# Altium PCB 8500_anger.PcbDoc
Units mil, origin at the board's own origin, x right, y up, seen from the top; angles counter-clockwise.
Board outline 2040 x 2040 mil, 4 copper layers (Top Layer, Conexiones, Tierra, Bottom Layer); 147 components, 91 nets, 428 pads, 93 vias.
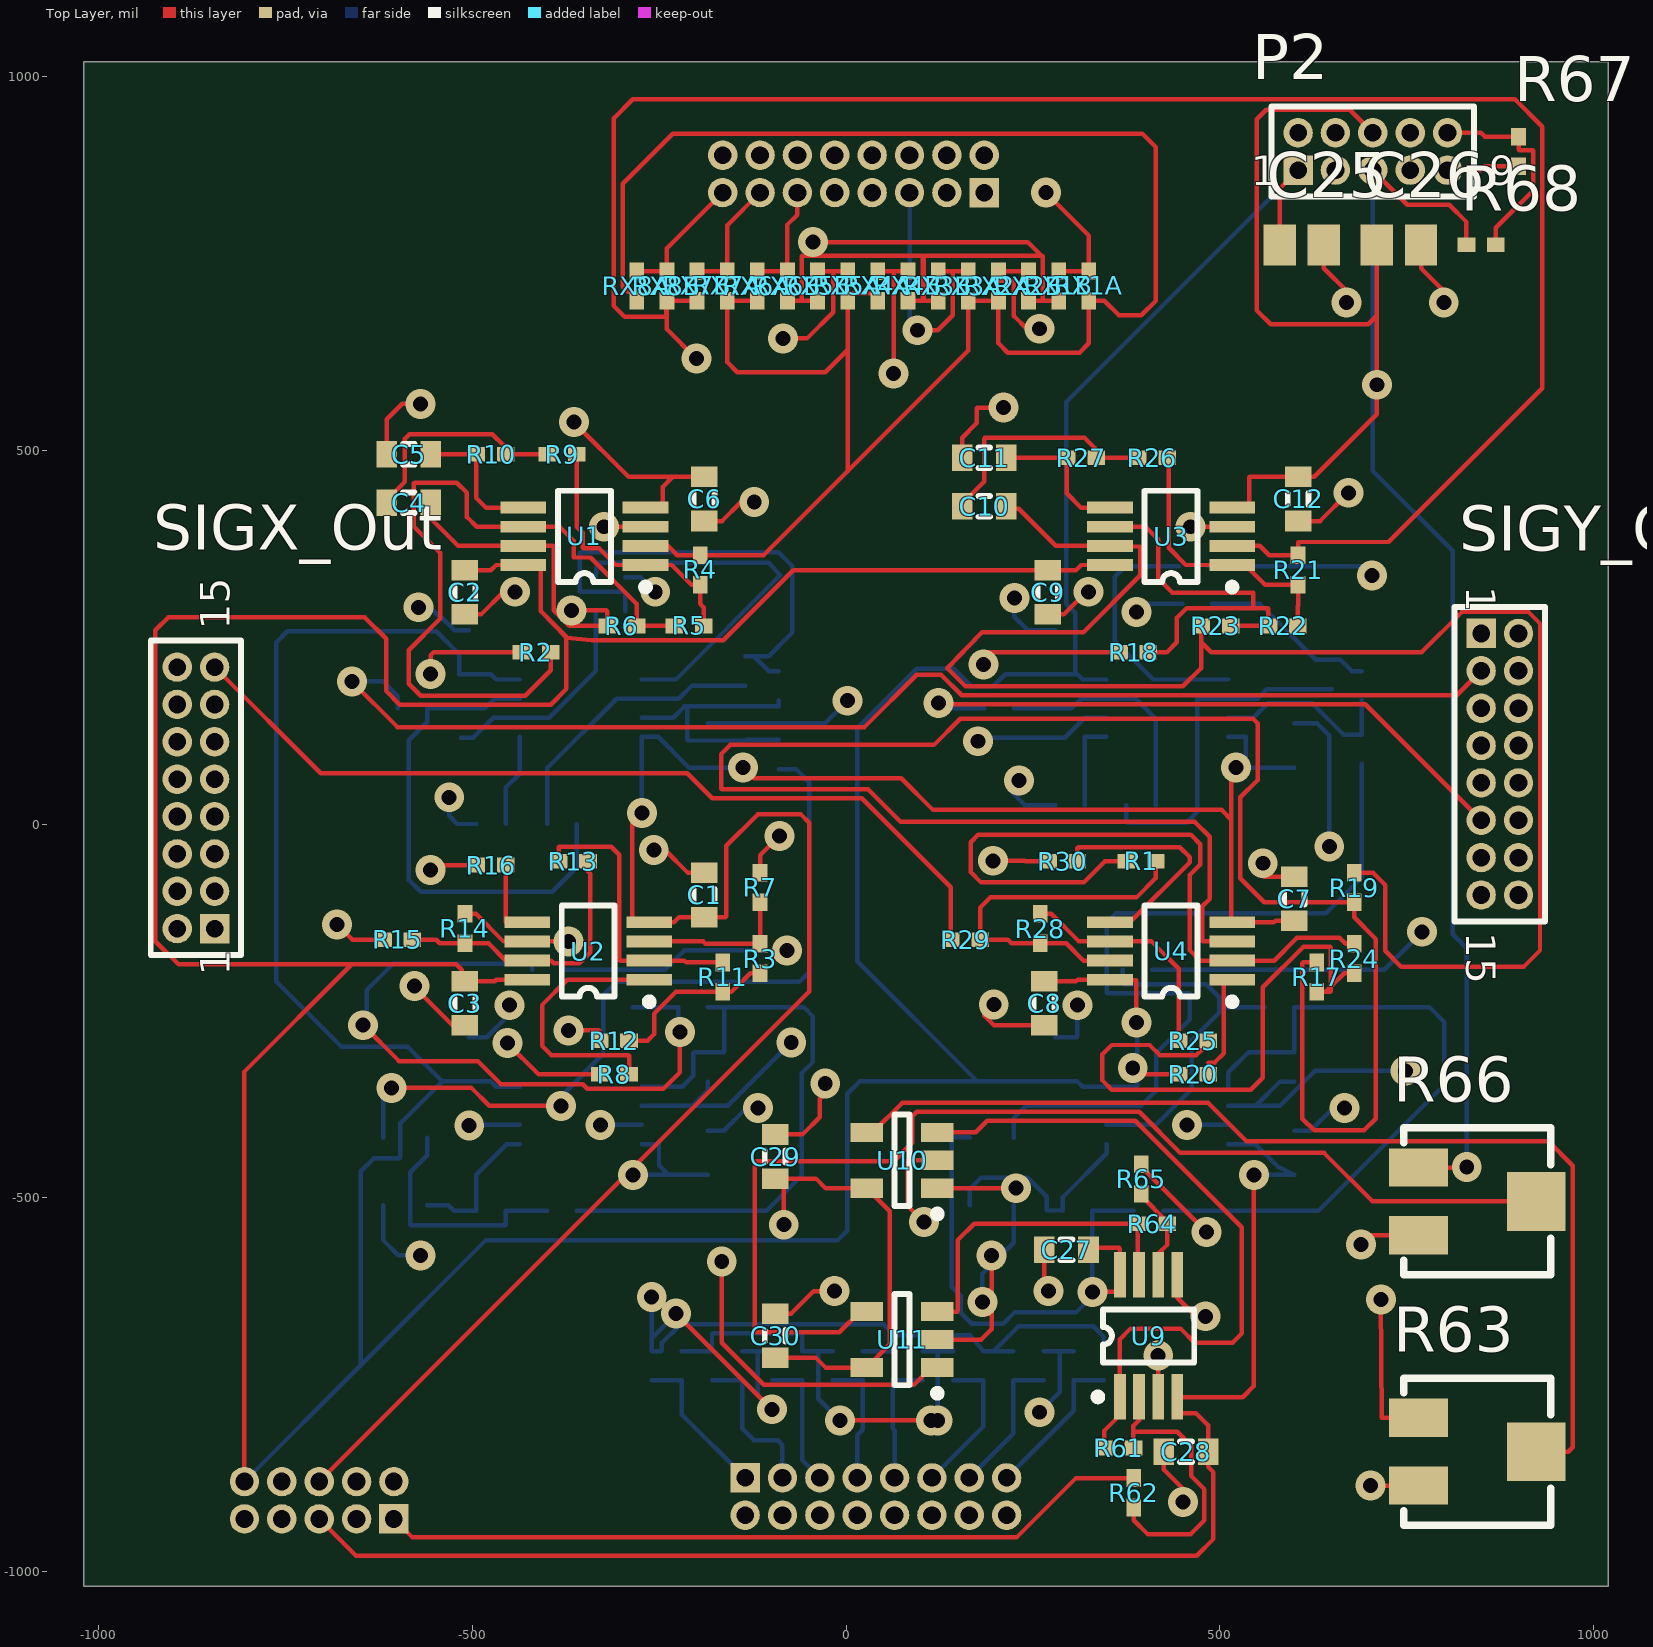
[diagram p0: Top Layer view]
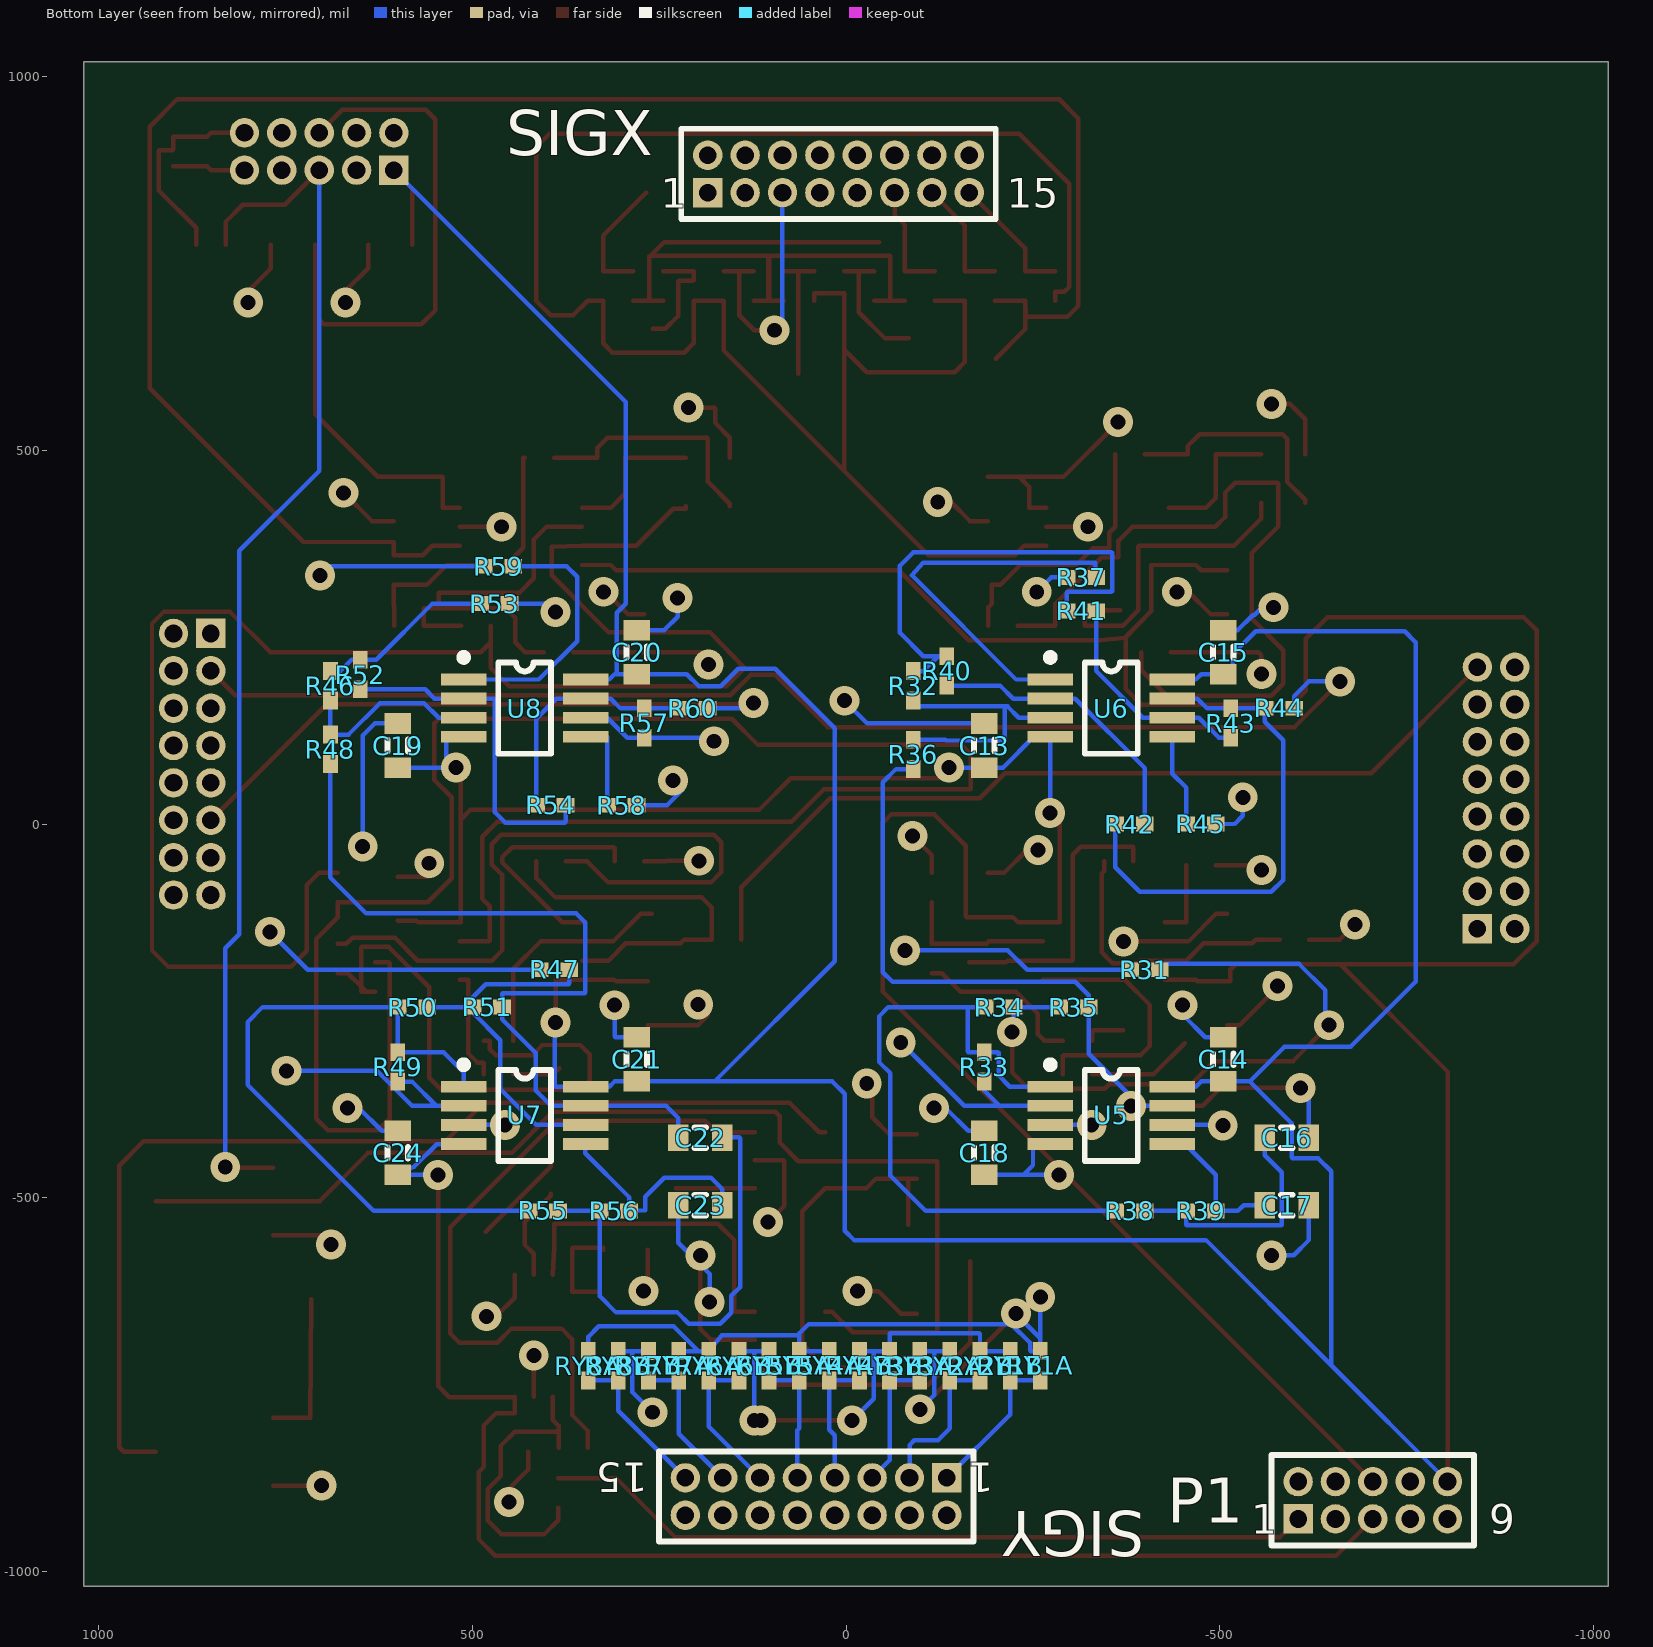
[diagram p1: Bottom Layer view, seen from below]
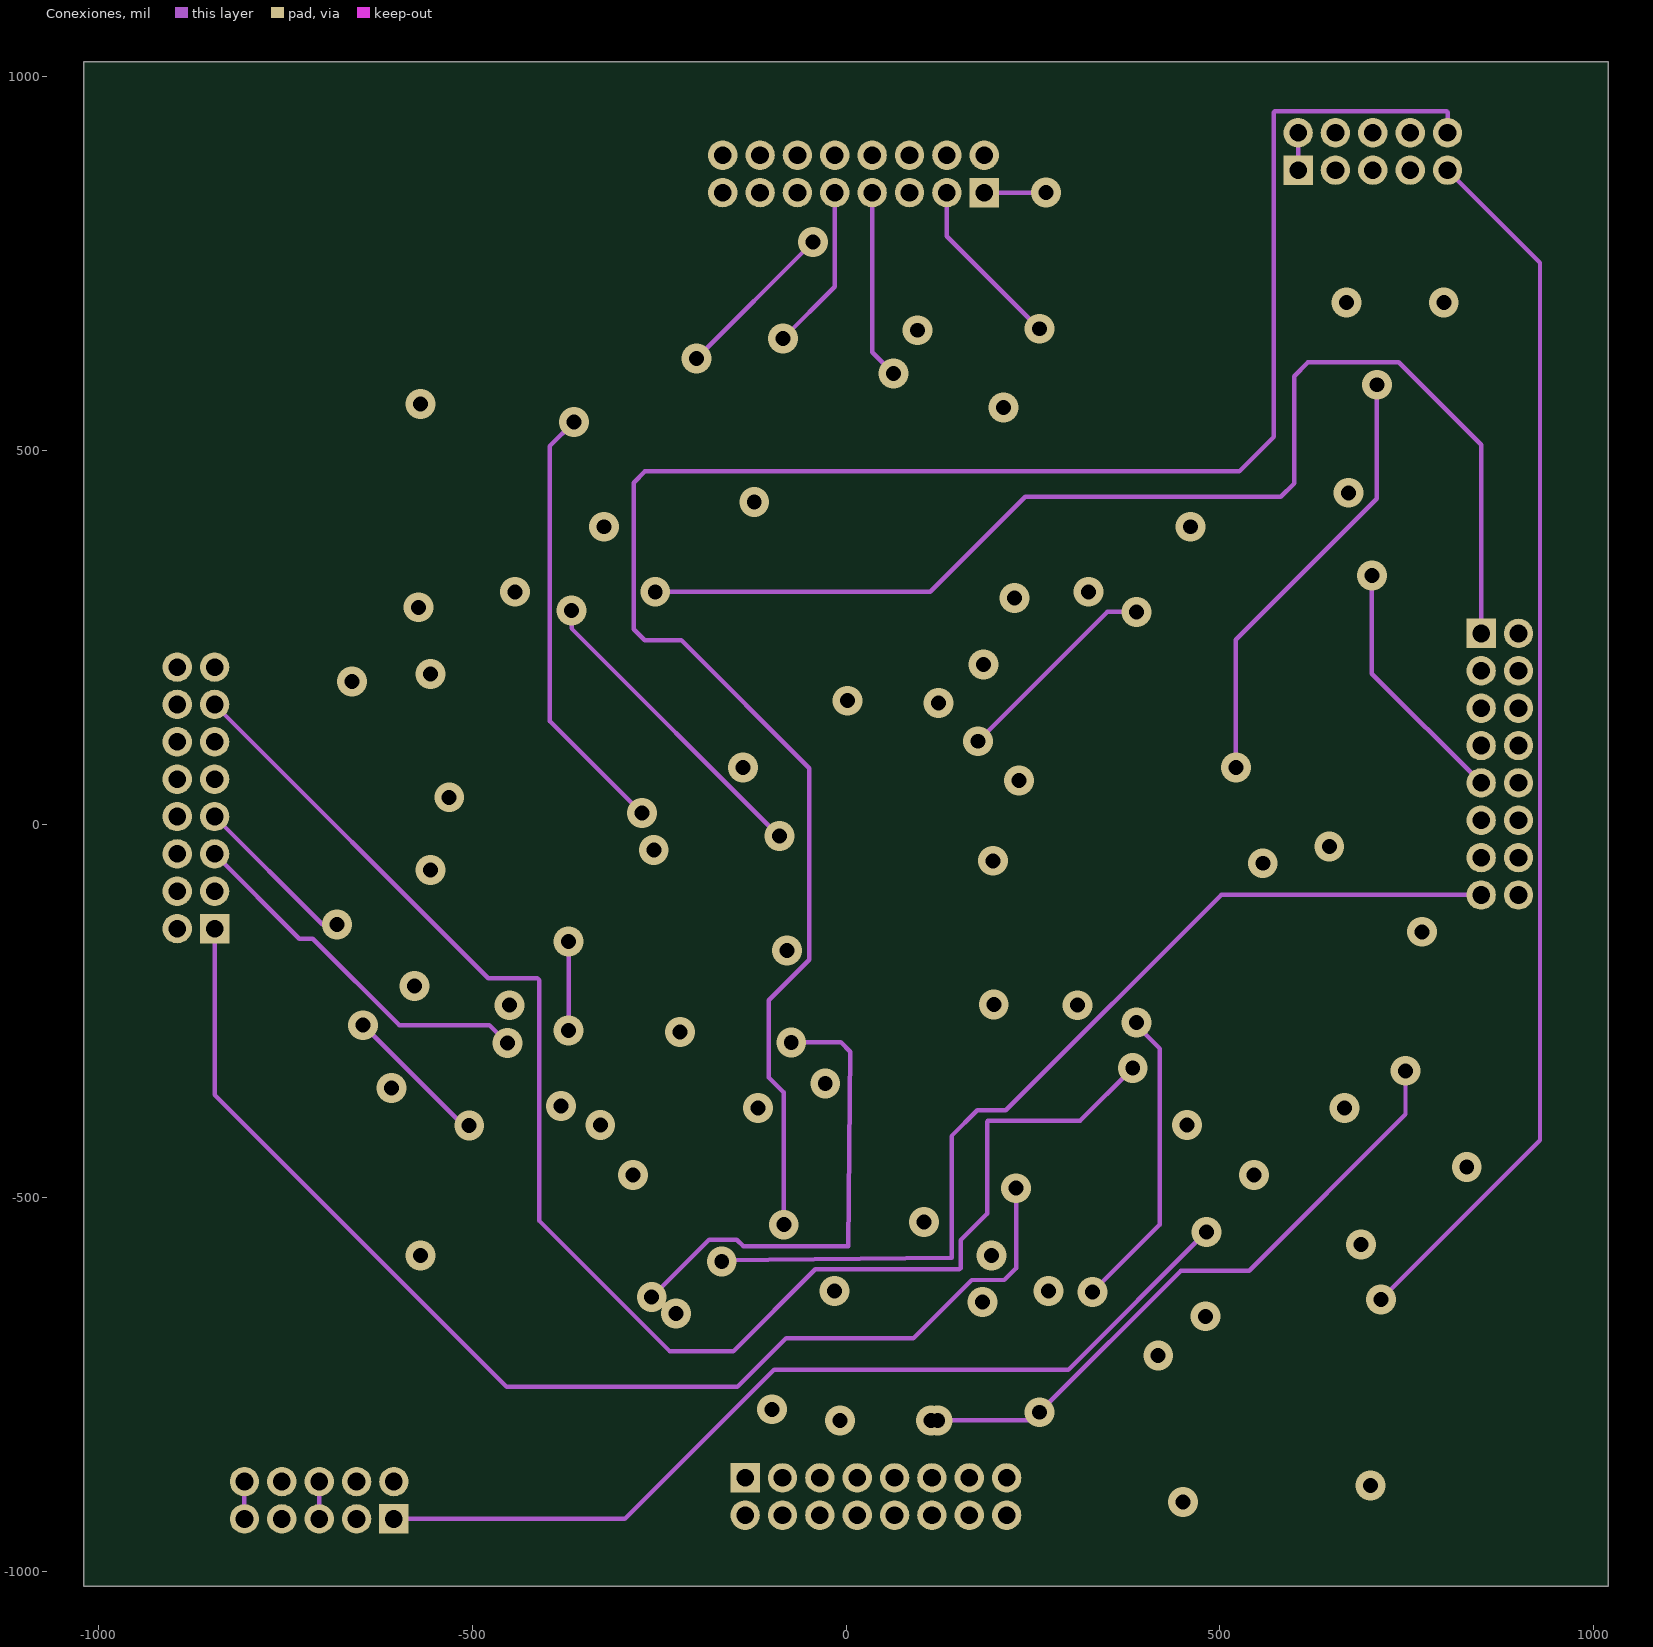
[diagram p2: Conexiones]
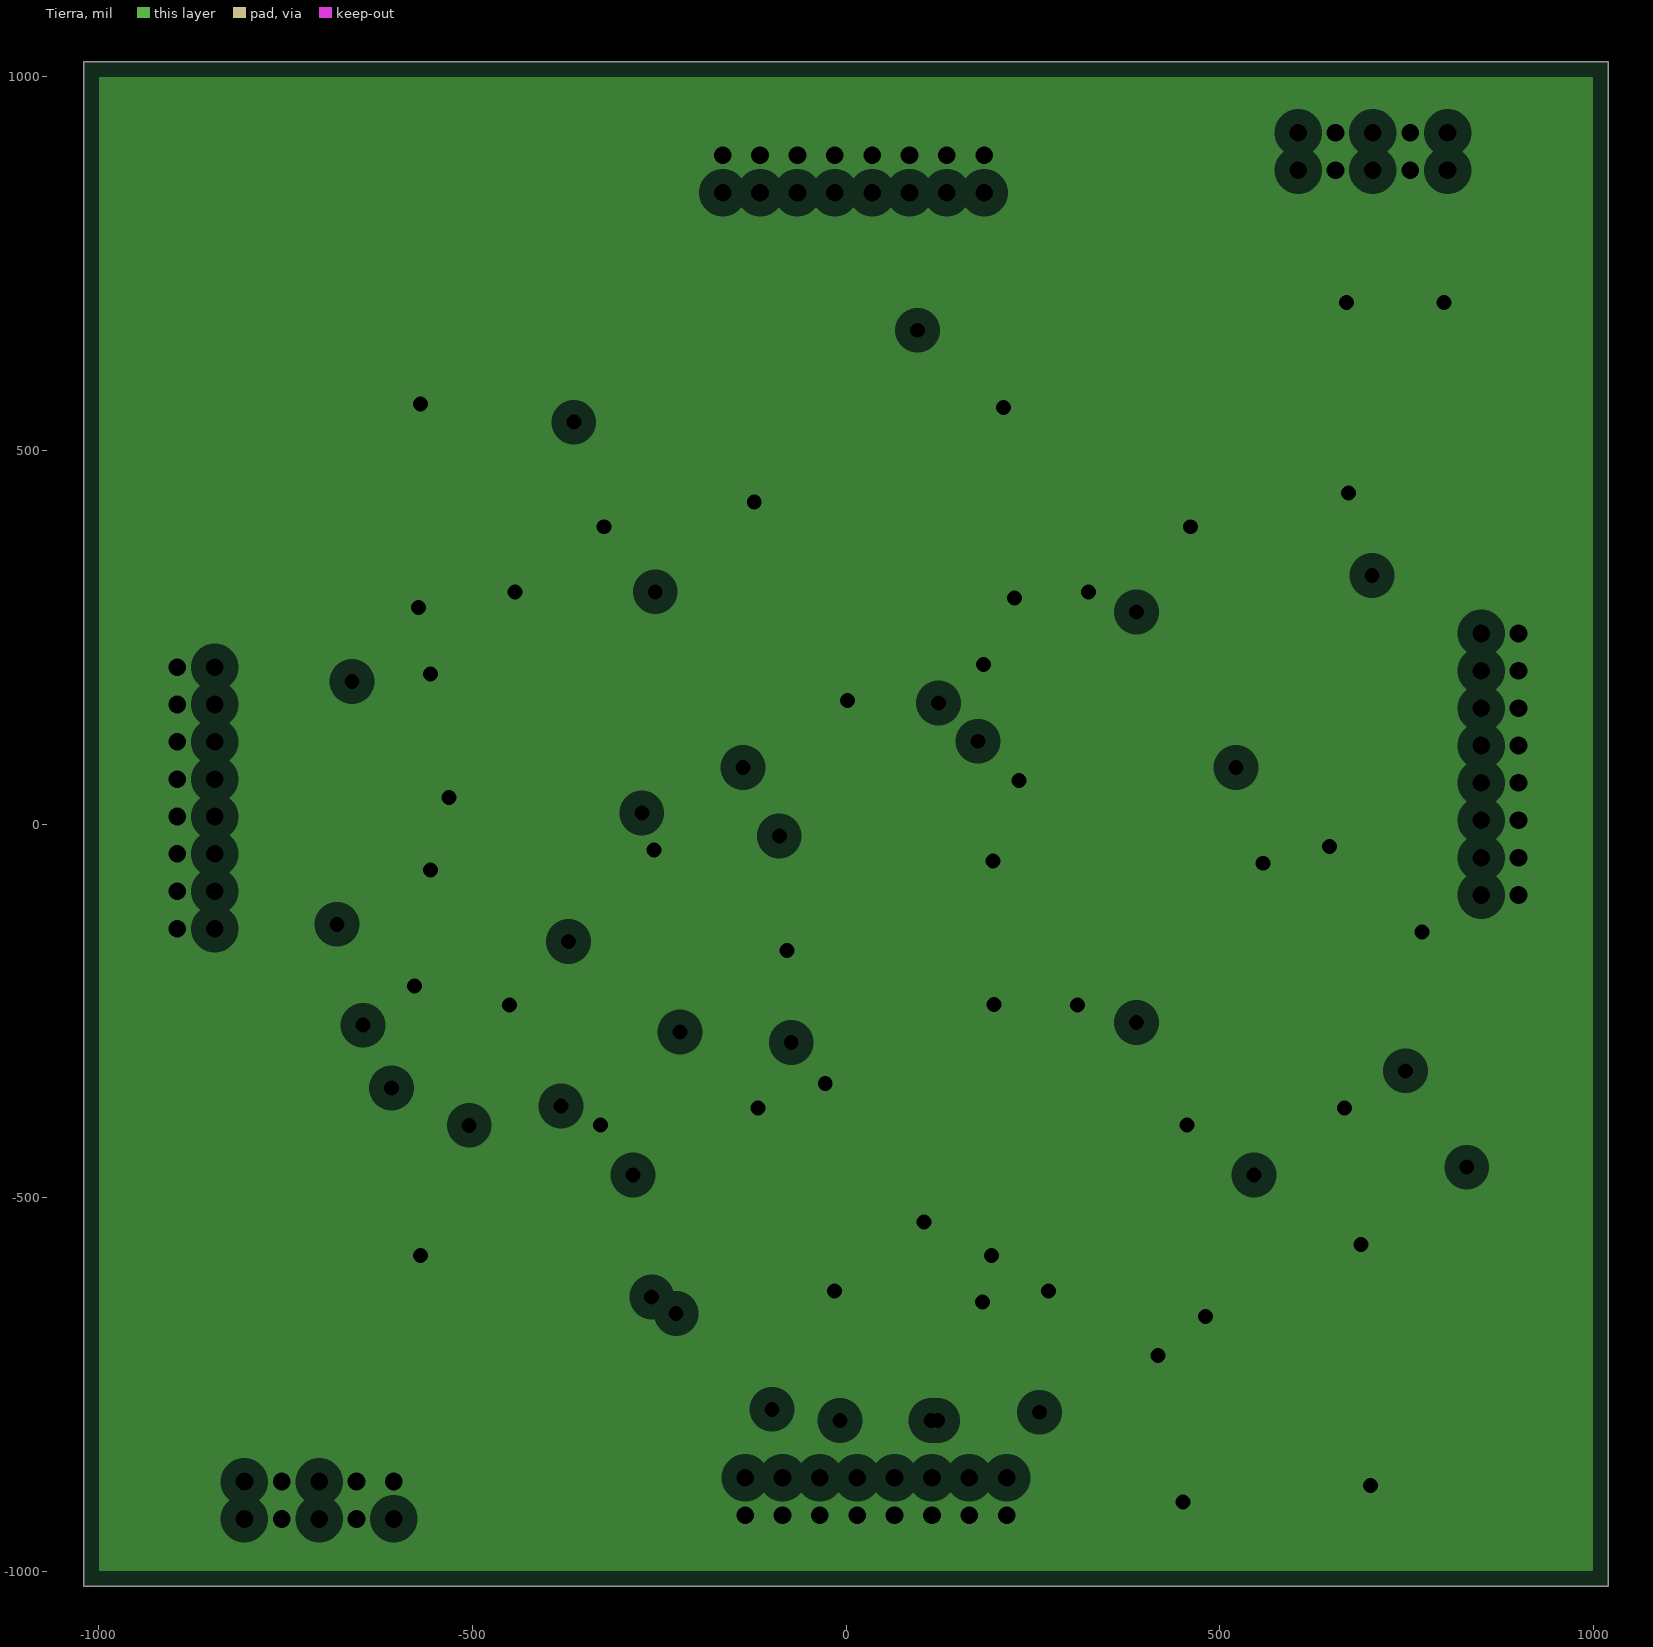
[diagram p3: Tierra, clearances drawn from the general rule]

## Layer stack, top to bottom
Top Layer: signal copper 1.4
Dielectric: core 12.6, FR-4, Dk 4.8
Conexiones: signal copper 1.4
Dielectric: prepreg 12.6, FR-4, Dk 4.8
Tierra: plane copper 1.4, net GND
Dielectric: core 12.6, FR-4, Dk 4.8
Bottom Layer: signal copper 1.4

## Board outline
-1020,-1020 1020,-1020 1020,1020 -1020,1020

## Design rules (kind name [scope] priority, off if disabled: settings)
Clearance [All] p1: gap=6
DiffPairsRouting [All] p1: maxlimit=10 minlimit=10 mostfreqgap=10 maxuncoupledlength=500
PlaneClearance [All] p1: clearance=20
PlaneConnect [All] p1: planeconnectstyle=Relief reliefexpansion=20 reliefentries=4 reliefconductorwidth=10 reliefairgap=10
PolygonConnect [All] p1: connectstyle=Relief reliefconductorwidth=10 reliefentries=4 polygonreliefangle="90 Angle"
RoutingVias [All] p1: holewidth=20 width=40 viastyle="Through Hole" minholewidth=20 minwidth=40 maxholewidth=20 maxwidth=40
SilkscreenOverComponentPads [All] p1: minsilkscreentomaskgap=10
SolderMaskExpansion SolderMaskExpansion_1 [IsVia] p1: expansion=1
SolderMaskExpansion [All] p2: expansion=4
Width [All] p1: maxlimit=10 minlimit=6 preferedwidth=6
24 further rules are at their usual default settings.

## Classes and differential pairs
component class 8500_anger_Y: C13 C14 C15 C16 C17 C18 C19 C20 C21 C22 C23 C24 C30 P2 R31 R32 R33 R34 R35 R36 R37 R38 R39 R40 R41 R42 R43 R44 R45 R46 R47 R48 R49 R50 R51 R52 R53 R54 R55 R56 R57 R58 R59 R60 R64 R65 R66 R67 R68 RY1A RY1B RY2A RY2B RY3A RY3B RY4A RY4B RY5A RY5B RY6A RY6B RY7A RY7B RY8A RY8B SIGY SIGY_Out U5 U6 U7 U8 U11
component class 8500_anger_X: C1 C2 C3 C4 C5 C6 C7 C8 C9 C10 C11 C12 C25 C26 C27 C28 C29 P1 R1 R2 R3 R4 R5 R6 R7 R8 R9 R10 R11 R12 R13 R14 R15 R16 R17 R18 R19 R20 R21 R22 R23 R24 R25 R26 R27 R28 R29 R30 R61 R62 R63 RX1A RX1B RX2A RX2B RX3A RX3B RX4A RX4B RX5A RX5B RX6A RX6B RX7A RX7B RX8A RX8B SIGX SIGX_Out U1 U2 U3 U4 U9 U10
differential pair XA: +XA_P -XA_N
differential pair XB: +XB_P -XB_N
differential pair YA: +YA_P -YA_N
differential pair YB: +YB_P -YB_N

## Components (designator, comment, footprint, x,y, rotation, side; value= is the part's Value field where it differs from the comment)
C1 "Cap" J1-0603 -190,-95 r90 top
C2 "Cap" J1-0603 -510,310 r270 top locked
C3 "Cap" J1-0603 -510,-240 r270 top
C4 "Cap" J1-0603 -585,430 r0 top locked
C5 "Cap" J1-0603 -585,495 r180 top locked
C6 "Cap" J1-0603 -190,435 r90 top locked
C7 "Cap" J1-0603 600,-100 r90 top
C8 "Cap" J1-0603 265,-240 r270 top
C9 "Cap" J1-0603 270,310 r270 top locked
C10 "Cap" J1-0603 185,425 r0 top locked
C11 "Cap" J1-0603 185,490 r180 top locked
C12 "Cap" J1-0603 605,435 r90 top locked
C13 "Cap" J1-0603 -185,105 r90 bottom locked
C14 "Cap" J1-0603 -505,-315 r90 bottom locked
C15 "Cap" J1-0603 -505,230 r90 bottom locked
C16 "Cap" J1-0603 -590,-420 r180 bottom locked
C17 "Cap" J1-0603 -590,-510 r180 bottom locked
C18 "Cap" J1-0603 -185,-440 r270 bottom locked
C19 "Cap" J1-0603 600,105 r90 bottom locked
C20 "Cap" J1-0603 280,230 r90 bottom locked
C21 "Cap" J1-0603 280,-315 r90 bottom locked
C22 "Cap" J1-0603 195,-420 r0 bottom locked
C23 "Cap" J1-0603 195,-510 r0 bottom locked
C24 "Cap" J1-0603 600,-440 r270 bottom locked
C25 "Cap Pol3" C0805 610,775 r0 top
C26 "Cap Pol3" C0805 740,775 r180 top
C27 "Cap" J1-0603 295,-570 r0 top
C28 "Cap" J1-0603 455,-840 r180 top
C29 "Cap" J1-0603 -95,-445 r270 top
C30 "Cap" J1-0603 -95,-685 r270 top
P1 "FTS-105-02-F-D" MHDR2X5 -605,-930 r180 bottom
P2 "SFMC-105-L3-S-D" MHDR2X5 605,875 r0 top
R1 "Res3" 0402 395,-50 r180 top
R2 "Res3" 0402 -415,230 r180 top locked
R3 "Res3" 0402 -115,-180 r90 top
R4 "Res3" 0402 -195,340 r90 top locked
R5 "Res3" 0402 -210,265 r0 top locked
R6 "Res3" 0402 -300,265 r0 top locked
R7 "Res3" 0402 -115,-85 r90 top
R8 "Res3" 0402 -310,-335 r0 top
R9 "Res3" 0402 -380,495 r0 top locked
R10 "Res3" 0402 -475,495 r0 top locked
R11 "Res3" 0402 -165,-205 r90 top
R12 "Res3" 0402 -310,-290 r180 top
R13 "Res3" 0402 -365,-50 r180 top
R14 "Res3" 0402 -510,-140 r90 top
R15 "Res3" 0402 -600,-155 r0 top
R16 "Res3" 0402 -475,-55 r0 top
R17 "Res3" 0402 630,-205 r90 top
R18 "Res3" 0402 385,230 r180 top locked
R19 "Res3" 0402 680,-85 r90 top
R20 "Res3" 0402 465,-335 r0 top
R21 "Res3" 0402 605,340 r90 top locked
R22 "Res3" 0402 585,265 r0 top locked
R23 "Res3" 0402 495,265 r0 top locked
R24 "Res3" 0402 680,-180 r90 top
R25 "Res3" 0402 465,-290 r180 top
R26 "Res3" 0402 410,490 r0 top locked
R27 "Res3" 0402 315,490 r0 top locked
R28 "Res3" 0402 260,-140 r90 top
R29 "Res3" 0402 160,-155 r0 top
R30 "Res3" 0402 290,-50 r0 top
R31 "Res3" 0402 -400,-195 r0 bottom locked
R32 "Res3" 0402 -90,185 r270 bottom locked
R33 "Res3" 0402 -185,-325 r270 bottom locked
R34 "Res3" 0402 -205,-245 r0 bottom locked
R35 "Res3" 0402 -305,-245 r0 bottom locked
R36 "Res3" 0402 -90,93.19 r270 bottom locked
R37 "Res3" 0402 -315,330 r180 bottom locked
R38 "Res3" 0402 -380,-517.87 r0 bottom locked
R39 "Res3" 0402 -475,-517.87 r0 bottom locked
R40 "Res3" 0402 -135,205 r270 bottom locked
R41 "Res3" 0402 -315,285 r180 bottom locked
R42 "Res3" 0402 -380,0 r180 bottom locked
R43 "Res3" 0402 -515,135 r270 bottom locked
R44 "Res3" 0402 -580,155 r0 bottom locked
R45 "Res3" 0402 -475,0 r0 bottom locked
R46 "Res3" 0402 690,185 r270 bottom locked
R47 "Res3" 0402 390,-195 r0 bottom locked
R48 "Res3" 0402 690,100 r270 bottom locked
R49 "Res3" 0402 600,-325 r270 bottom locked
R50 "Res3" 0402 580,-245 r0 bottom locked
R51 "Res3" 0402 480,-245 r0 bottom locked
R52 "Res3" 0402 650,200 r270 bottom locked
R53 "Res3" 0402 470,295 r180 bottom locked
R54 "Res3" 0402 395,25 r180 bottom locked
R55 "Res3" 0402 405,-517.87 r0 bottom locked
R56 "Res3" 0402 310,-517.87 r0 bottom locked
R57 "Res3" 0402 270,135 r270 bottom locked
R58 "Res3" 0402 300,25 r0 bottom locked
R59 "Res3" 0402 465,345 r180 bottom locked
R60 "Res3" 0402 205,155 r0 bottom locked
R61 "Res3" 0402 365,-835 r0 top
R62 "Res3" 0402 385,-895 r90 top
R63 "3224J" POT4MM-2 845,-840 r0 top
R64 "Res3" 0402 410,-535 r0 top
R65 "Res3" 0402 395,-475 r90 top
R66 "3224J" POT4MM-2 845,-505 r0 top
R67 "Res3" 0402 900,900 r90 top
R68 "Res3" 0402 850,775 r0 top
RX1A "Res3" 0402 325,720 r90 top
RX1B "Res3" 0402 284.66,720 r90 top
RX2A "Res3" 0402 204,720 r90 top
RX2B "Res3" 0402 244.33,720 r90 top
RX3A "Res3" 0402 163.67,720 r90 top
RX3B "Res3" 0402 123.33,720 r90 top
RX4A "Res3" 0402 42.67,720 r90 top
RX4B "Res3" 0402 83,720 r90 top
RX5A "Res3" 0402 2.33,720 r90 top
RX5B "Res3" 0402 -38,720 r90 top
RX6A "Res3" 0402 -118.67,720 r90 top
RX6B "Res3" 0402 -78.33,720 r90 top
RX7A "Res3" 0402 -159,720 r90 top
RX7B "Res3" 0402 -199.33,720 r90 top
RX8A "Res3" 0402 -280,720 r90 top
RX8B "Res3" 0402 -239.67,720 r90 top
RY1A "Res3" 0402 -260,-725 r270 bottom
RY1B "Res3" 0402 -219.67,-725 r270 bottom
RY2A "Res3" 0402 -139,-725 r270 bottom
RY2B "Res3" 0402 -179.33,-725 r270 bottom
RY3A "Res3" 0402 -98.67,-725 r270 bottom
RY3B "Res3" 0402 -58.33,-725 r270 bottom
RY4A "Res3" 0402 22.33,-725 r270 bottom
RY4B "Res3" 0402 -18,-725 r270 bottom
RY5A "Res3" 0402 62.67,-725 r270 bottom
RY5B "Res3" 0402 103,-725 r270 bottom
RY6A "Res3" 0402 183.67,-725 r270 bottom
RY6B "Res3" 0402 143.33,-725 r270 bottom
RY7A "Res3" 0402 224,-725 r270 bottom
RY7B "Res3" 0402 264.33,-725 r270 bottom
RY8A "Res3" 0402 345,-725 r270 bottom
RY8B "Res3" 0402 304.66,-725 r270 bottom
SIGX "FTS-108-02-F-D" MHDR2X8 185,845 r180 bottom
SIGX_Out "SFMC-108-L3-S-D" MHDR2X8 -845,-140 r90 top locked
SIGY "FTS-108-02-F-D" MHDR2X8 -135,-875 r0 bottom
SIGY_Out "SFMC-108-L3-S-D" MHDR2X8 850,255 r270 top locked
U1 "AD8056ARM" RM-8 -350,385 r90 top locked
U2 "AD8056ARM" RM-8 -345,-170 r90 top
U3 "AD8056ARM" RM-8 435,385 r90 top locked
U4 "AD8056ARM" RM-8 435,-170 r90 top
U5 "AD8056ARM" RM-8 -355,-390 r270 bottom locked
U6 "AD8056ARM" RM-8 -355,155 r270 bottom locked
U7 "AD8056ARM" RM-8 430,-390 r270 bottom locked
U8 "AD8056ARM" RM-8 430,155 r270 bottom locked
U9 "AD8056ARM" RM-8 405,-685 r0 top
U10 "ADCMP600" SOT23-5_N 75,-450 r180 top
U11 "ADCMP600" SOT23-5_N 75,-690 r180 top

## Footprints (in the part's own frame and the unit in brackets; to place one, negate y for a bottom-side part, rotate by r counter-clockwise, add the part's x,y. Pads: shape width x height; smd on the part's side, far side on the other; paste and mask are expansions set on the pad)
0402 [mm] "Chip Capacitor, Body 1.0x0.5mm, IPC High Density"
  rect 0.6x0.5 smd: 1(-0.5,0) 2(0.5,0)
  body extent -0.55,-0.3 0.55,0.3, height 1.3
C0805 [mm] "Chip Capacitor, Body 2.0x1.3mm, IPC High Density"
  rect 1.1x1.4 smd: 1(-0.75,0) 2(0.75,0)
  body extent -1.1,-0.72 1.1,0.72, height 1.4
J1-0603 [mm] "Chip Resistor, Body 1.6x0.8mm, IPC High Density"
  rect 0.7x0.9 smd: 1(-0.75,0) 2(0.75,0)
  silkscreen extent -0.2,-0.35 0.2,0.35, body extent -0.85,-0.48 0.85,0.48, height 0.9
MHDR2X5 [mm] "Connector; Header; 5x2 Position"
  rect 1x1 hole 0.6: 1(0,0)
  round 1 hole 0.6: 2(0,1.27) 3(1.27,0) 4(1.27,1.27) 5(2.54,0) 6(2.54,1.27) 7(3.81,0) 8(3.81,1.27) 9(5.08,0) 10(5.08,1.27)
  silkscreen extent -0.9,-0.9 5.98,2.17
MHDR2X8 [mm] "Connector; Header; 8x2 Position"
  rect 1x1 hole 0.6: 1(0,0)
  round 1 hole 0.6: 2(0,1.27) 3(1.27,0) 4(1.27,1.27) 5(2.54,0) 6(2.54,1.27) 7(3.81,0) 8(3.81,1.27) 9(5.08,0) 10(5.08,1.27) 11(6.35,0) 12(6.35,1.27) 13(7.62,0) 14(7.62,1.27) 15(8.89,0) 16(8.89,1.27)
  silkscreen extent -0.9,-0.9 9.79,2.17
POT4MM-2 [mm] "Square Trimming Potentiometer"
  rect 2x1.3 smd: CCW(-2,-1.15) CW(-2,1.15)
  rect 2x2 smd: W(2,0)
  silkscreen extent -2.5,-2.5 2.5,2.5
RM-8 [mm] "Shrink Small Outline, MSOP; 8 Leads; Body Width 3 mm; Pitch 0.65 mm"
  rect 0.4x1.55 smd: 1(-0.975,-2.075) 2(-0.325,-2.075) 3(0.325,-2.075) 4(0.975,-2.075) 5(0.975,2.075) 6(0.325,2.075) 7(-0.325,2.075) 8(-0.975,2.075)
  silkscreen extent -1.85,-2.2 1.55,0.9
SOT23-5_N [mm] "SOT23, 5-Leads, Body 2.9x1.6mm, Pitch 0.95mm, Lead Span 2.8mm, IPC Medium Density"
  rect 1.1x0.65 smd: 1(-1.2,0.95) 2(-1.2,0) 3(-1.2,-0.95) 4(1.2,-0.95) 5(1.2,0.95)
  silkscreen extent -1.33,-1.55 0.25,1.95, body extent -0.9,-1.55 0.9,1.55, height 1.45

## Part data
C1 C2 C3 C4 C5 C6 C7 C8 C9 C10 C11 C12 C13 C14 C15 C16 C17 C18 C19 C20 C21 C22 C23 C24 C27 C28 C29 C30: "Capacitor"
C25 C26: "Polarized Capacitor (Surface Mount)"
P2: library part FTS-105-02-F-D
R1 R2 R3 R4 R5 R6 R7 R8 R9 R10 R11 R12 R13 R14 R15 R16 R17 R18 R19 R20 R21 R22 R23 R24 R25 R26 R27 R28 R29 R30 R31 R32 R33 R34 R35 R36 R37 R38 R39 R40 R41 R42 R43 R44 R45 R46 R47 R48 R49 R50 R51 R52 R53 R54 R55 R56 R57 R58 R59 R60 R61 R62 R64 R65 R67 R68 RX1A RX1B RX2A RX2B RX3A RX3B RX4A RX4B RX5A RX5B RX6A RX6B RX7A RX7B RX8A RX8B RY1A RY1B RY2A RY2B RY3A RY3B RY4A RY4B RY5A RY5B RY6A RY6B RY7A RY7B RY8A RY8B: "Resistor"
R63 R66: library part "RPot SM", "Square Trimming Potentiometer"
SIGX SIGX_Out SIGY SIGY_Out: library part FTR-108-01-D
U1 U2 U3 U4 U5 U6 U7 U8 U9: "Low Cost, 300MHz Voltage Feedback Amplifier"

## Via types
v1: diameter 40, hole 20, Top Layer to Bottom Layer, 76 vias
v2: diameter 40, hole 20, Top Layer to Conexiones, 17 vias

## Nets (pads, with @x,y where several pads share a name; then routed paths per layer and width w, separated by ;. In a path a pad name is that pad's centre, name@x,y a point inside that pad or via, vN(x,y) a via of type N, cw(c..) or ccw(c..) an arc to the next point about the centre after c; other vN are vias at no path point)
+3.3: C29.2 C30.2 P2.10 R67.2 R68.2 U10.5 U11.5 | length 3592.3
  Top Layer w6: C30.2 -40.25,-714.53 -27.38,-727.4 U11.5 58.75,-696.41 58.75,-518.39 U10.5 -27.38,-487.4 -40.25,-474.53 C29.2@-83.25,-474.53 ; C29.2 C29.2@-83.25,-474.53 ; v2(-83.25,-536.25) C29.2@-83.25,-474.53 ; P2.10 849.75,925 855.06,919.69 R67.2 900,902.75 901,901.75 918.75,901.75 919.75,900.75 919.75,847.81 869.69,797.75 R68.2
  Conexiones w6: v2(-83.25,-536.25) -83.25,-359.25 -103.25,-339.25 -103.25,-235.75 -49.25,-181.75 -49.25,74.75 -220.25,245.75 -269.25,245.75 -284.25,260.75 -284.25,456.75 -269.25,471.75 526.25,471.75 572.75,518.25 572.75,952.75 573.75,953.75 804,953.75 805,952.75 P2.10
+3.3_1: P2.9 R63.CW R67.1 | length 1955.9
  Top Layer w6: v2(715.75,-636.25) 716.75,-794.72 R63.CW ; P2.9 849.75,875 855.06,880.32 R67.1
  Conexiones w6: v2(715.75,-636.25) 928.75,-423.25 928.75,751.25 P2.9
+3.3_2: P2.5 R66.CW R68.1 | length 1635.8
  Top Layer w6: P2.5 751.25,828.75 807.32,828.75 830.32,805.75 R68.1 ; R66.CW 830.28,-459.72 v1(830.75,-459.25)
  Bottom Layer w6: P2.5 705,472.5 812,365.5 812,-147.65 830.75,-166.4 v1(830.75,-459.25)
+5: C2.1 C3.1 C8.1 C9.1 C14.1 C15.1 C20.1 C21.1 C25.1 C27.2 P1.9 P1.10 P2.1 P2.2 U1.8 U2.8 U3.8 U4.8 U5.8 U6.8 U7.8 U8.8 U9.8 | length 9399.8
  Top Layer w6: P1.10 -805,-331.25 -661.5,-187.75 ; C2.1 -475.25,339.53 -468.17,346.61 U1.8 -408.25,346.61 -408.25,284.75 ; U2.8 -468.17,-208.39 -470.25,-210.47 C3.1 -514.25,-210.47 -514.25,-195.25 -521.75,-187.75 -661.5,-187.75 ; C8.1 307.75,-210.47 309.83,-208.39 U4.8 388.75,-209.39 v1(388.75,-265.75) ; C27.2 324.53,-567.25 365.61,-567.25 366.61,-568.25 U9.8 366.61,-626.25 v2(329.75,-626.25) ; U3.8 314.83,346.61 307.75,339.53 C9.1 -70.47,339.53 -164.25,245.75 -340.25,245.75 -374.25,249.53 ; C25.1 580.47,850.47 P2.1 ; -661.5,-187.75 -893.25,-187.75 -924.25,-156.75 -924.25,259.25 -906.75,276.75 -644.25,276.75 -615.25,247.75 -615.25,178 -597,159.75 -395.25,159.75 -374.25,180.75 -374.25,249.53 ; -408.25,284.75 -374.25,250.75 -374.25,249.53 ; -408.25,284.75 -374.25,249.53
  Conexiones w6: P1.9 P1.10 ; v2(329.75,-626.25) 419.96,-536.04 419.96,-300.47 388.75,-269.25 v1(388.75,-265.75) ; P2.1 P2.2
  Bottom Layer w6: P1.10 -649.25,-724.25 ; U5.8 -468.17,-351.61 -475.25,-344.53 C14.1 -540.48,-344.53 ; U6.8 -468.17,193.39 -475.25,200.47 C15.1 -517.25,200.47 -517.25,226.75 -548.25,257.75 -747.75,257.75 -762.25,243.25 -762.25,-211.25 -675.25,-298.25 -586.75,-298.25 -540.48,-344.53 ; U8.8 316.83,193.39 309.75,200.47 306.75,200.47 ; v1(388.75,-265.75) 389.75,-266.75 389.75,-350.61 388.75,-351.61 U7.8 316.83,-351.61 309.75,-344.53 C21.1 176.02,-344.53 ; P2.1 294.75,564.75 294.75,294.75 306.75,282.75 306.75,200.47 ; -649.25,-724.25 -649.25,-464.75 -631.75,-447.25 -597.25,-447.25 -596.25,-446.25 -596.25,-400.3 -540.48,-344.53 ; -649.25,-724.25 -481.75,-556.75 -10.75,-556.75 1.75,-544.25 1.75,-361.03 18.25,-344.53 176.02,-344.53 ; 176.02,-344.53 15.25,-183.75 15.25,128.25 94.75,207.75 144,207.75 167.5,184.25 196.78,184.25 213,200.47 C20.1 306.75,200.47
-5: C1.1 C6.2 C7.1 C12.2 C13.1 C18.2 C19.1 C24.2 C26.2 C28.1 P1.5 P1.6 P2.6 U1.4 U2.4 U3.4 U4.4 U5.4 U6.4 U7.4 U8.4 U9.4 | length 7820.6
  Top Layer w6: P1.5 -655.75,-979.25 469.25,-979.25 491.75,-956.75 491.75,-867.47 484.53,-860.25 C28.1 484.53,-804.53 468.25,-788.25 443.39,-788.25 U9.4@443.39,-767.25 ; P1.6 v1@-294.53,-469.53 ; v1(-364.25,537.75) -291.03,464.53 -231.75,464.53 ; v1(-285.25,-469.53) v1@-294.53,-469.53 ; v1(-273.25,14.75) -286.25,1.75 -286.25,-131.61 U2.4 -230.25,-131.61 -223.17,-124.53 C1.1 -161.25,-124.53 -160.25,-123.53 -160.25,-29.25 -118.25,12.75 -60.25,12.75 -49.25,1.75 -49.25,-224.25 v1@-294.53,-469.53 ; U1.4 -245.25,423.39 -245.25,451.03 -231.75,464.53 ; C6.2 -231.75,464.53 ; v1(-137.98,75.47) -123.75,61.25 74.01,61.25 116.51,18.75 502.75,18.75 515.75,5.75 ; U9.4 U9.4@443.39,-767.25 ; U3.4 539.75,423.39 539.75,464.03 540.25,464.53 C12.2 626.75,464.53 710.47,548.25 v2(710.47,587.8) 710.47,680.47 ; v1(521.75,75.47) 515.75,69.47 515.75,5.75 ; v1(545.81,-469.53) 545.81,-752.19 530.75,-767.25 U9.4@443.39,-767.25 ; C7.1 574.83,-129.53 572.75,-131.61 U4.4 515.75,-131.61 515.75,5.75 ; P2.6 674.25,955.75 562.25,955.75 549.75,943.25 549.75,687.25 568.25,668.75 698.75,668.75 710.47,680.47 ; C26.2 710.47,680.47
  Conexiones w6: P1.5 P1.6 ; v1(-364.25,537.75) -396.25,505.75 -396.25,137.75 v1(-273.25,14.75) ; v1(521.75,75.47) 521.75,246.75 710.47,435.47 v2(710.47,587.8)
  Bottom Layer w6: v1(-285.25,-469.53) -237.48,-469.53 ; U5.4 -250.25,-428.39 -250.25,-456.75 -237.48,-469.53 ; U6.4 U6.4@-273.25,116.61 ; v1(-273.25,14.75) U6.4@-273.25,116.61 ; C18.2 -237.48,-469.53 ; v1(-137.98,75.47) C13.1 -210.11,75.47 -251.25,116.61 U6.4@-273.25,116.61 ; U7.4 547.75,-428.39 577.75,-458.39 C24.2 v1(545.81,-469.53) ; U8.4 534.75,116.61 534.75,88.47 v1(521.75,75.47) C19.1
GND: C1.2 C2.2 C3.2 C5.2 C6.1 C7.2 C8.2 C9.2 C11.2 C12.1 C13.2 C14.2 C15.2 C17.2 C18.1 C19.2 C20.2 C21.2 C23.2 C24.1 C25.2 C26.1 C27.1 C28.2 C29.1 C30.1 P1.2 P1.3 P1.4 P1.7 P1.8 P2.3 P2.4 P2.7 P2.8 R2.2 R16.1 R18.2 R30.1 R31.2 R45.1 R47.2 R58.1 R63.CCW R66.CCW SIGX.2 SIGX.4 SIGX.6 SIGX.8 SIGX.10 SIGX.12 SIGX.14 SIGX.16 SIGX_Out.2 SIGX_Out.4 SIGX_Out.6 SIGX_Out.8 SIGX_Out.10 SIGX_Out.12 SIGX_Out.14 SIGX_Out.16 SIGY.2 SIGY.4 SIGY.6 SIGY.8 SIGY.10 SIGY.12 SIGY.14 SIGY.16 SIGY_Out.2 SIGY_Out.4 SIGY_Out.6 SIGY_Out.8 SIGY_Out.10 SIGY_Out.12 SIGY_Out.14 SIGY_Out.16 U1.3 U3.3 U5.3 U7.3 U9.3 U9.5 U10.2 U11.2 | length 4679.7
  Top Layer w6: C5.2 -614.53,541.71 -594.02,562.22 v1(-569.25,562.22) ; v1(-577.22,-216.75) -577.22,-218.88 -526.57,-269.53 C3.2 ; v1(-556,-61.75) -549.25,-55 R16.1 ; v1(-556,200.75) -556,225.75 -551.75,230 R2.2 ; C2.2 -488.43,280.47 -458.15,310.75 v1(-442.78,310.75) ; v1(-323.82,397.8) U1.3 ; v1(-257.22,-35) -241.95,-35 -211.47,-65.47 C1.2 ; C6.1 -165.93,405.47 -140.65,430.75 v1(-122.78,430.75) ; C30.1 -73.53,-655.47 -43.05,-625 v1(-15.28,-625) ; C29.1 -58.26,-415.47 -35.27,-392.49 -35.27,-367.49 -27.78,-360 v1(-27.78,-347.5) ; v1(104.25,-532.75) 82.41,-510.91 82.41,-451.25 83.66,-450 U10.2 ; U11.2 180.75,-690 194.75,-676 v1(194.75,-577.25) ; C11.2 155.47,517.05 175.13,536.71 175.13,556.37 175.98,557.22 v1(210.75,557.22) ; v1(184,213.25) 184,225.75 188.25,230 R18.2 ; v1(196.5,-49.25) 239.14,-49.25 239.89,-50 R30.1 ; v1(197.78,-241.75) 186.75,-241.75 185.28,-243.22 185.28,-256.75 198.06,-269.53 C8.2 ; C27.1 265.47,-619.44 v1(270.75,-624.72) ; C9.2 291.57,280.47 321.85,310.75 v1(324.72,310.75) ; U9.3 v1(417.8,-711.18) ; C28.2 425.47,-864.07 450.75,-889.35 v1(450.75,-907.22) ; U9.5 443.39,-633.82 468.39,-658.82 v1(480.89,-658.82) ; v1(461.18,397.8) U3.3 ; v1(557.78,-52.5) 546.75,-52.5 545.28,-53.96 545.28,-56.75 559,-70.47 C7.2 ; C12.1 634.44,405.47 v1(672.22,443.25) ; C25.2 639.53,743.68 670,713.21 v1(670,697.94) ; v1(689.39,-562.78) 701.89,-550.28 R66.CCW ; v1(701.89,-885.28) R63.CCW ; C26.1 769.53,743.68 800,713.21 v1(800,697.94)
  Bottom Layer w6: C17.2 -619.53,-556.71 -599.02,-577.22 v1(-569.25,-577.22) ; v1(-572.22,290) -556.95,290 -546.34,279.39 -544.25,279.39 -524.38,259.53 C15.2 ; v1(-531,35.75) -531,10.88 -520.11,0 R45.1 ; C14.2 -480.76,-285.47 -450.28,-255 v1(-450.28,-242.5) ; R31.2 -242.38,-195 -216.63,-169.25 v1(-79,-169.25) ; v1(-328.82,-402.8) U5.3 ; C18.1 -163.53,-410.47 -133.05,-380 v1(-117.78,-380) ; C13.2 -28.26,134.53 v1(2.22,165) ; v1(182.5,-639.72) 182.5,-602.22 224.53,-560.19 C23.2 ; v1(225.28,302.5) 225.28,277.49 243.25,259.53 C20.2 ; v1(231.5,58.25) 220.5,58.25 219,56.75 219,45.51 239.51,25 R58.1 ; C21.2 308.5,-285.47 309.72,-284.25 v1(309.72,-242.5) ; R47.2 720.25,-195 v1(771,-144.25) ; v1(456.18,-402.8) U7.3 ; C24.1 621.47,-410.47 651.95,-380 v1(667.22,-380) ; C19.2 630.75,134.53 646.75,118.53 v1(646.75,-30.25)
NetC4_1: C4.1 R9.1 R10.2 | length 306.2
  Top Layer w6: C4.1 -614.53,433.75 -590.25,458.02 -590.25,515.75 -584.25,521.75 -473.25,521.75 -457.25,505.75 -457.25,495 R10.2 R9.1
NetC4_2: C4.2 R6.1 R7.2 U1.7 | length 911.3
  Top Layer w6: C4.2 -555.47,408.42 -519.25,372.2 U1.7 -392.25,372.2 -391.25,371.2 -391.25,286 -370.25,265 R6.1 -319.69,284.75 -320.69,285.75 v2(-367.25,285.75) ; R7.2 -115,-42 v1(-89.25,-16.25)
  Conexiones w6: v2(-367.25,285.75) -367.25,261.75 v1(-89.25,-16.25)
NetC5_1: C5.1 R10.1 U1.5 | length 187.8
  Top Layer w6: C5.1 R10.1 -494.69,436.32 -481.75,423.39 U1.5
NetC10_1: C10.1 R26.1 R27.2 | length 327.7
  Top Layer w6: C10.1 155.47,428.75 184.75,458.02 184.75,515.75 185.75,516.75 319.25,516.75 332.75,503.25 332.75,490 R27.2 R26.1
NetC10_2: C10.2 R19.2 R23.1 U3.7 | length 2254.4
  Top Layer w6: C10.2 214.53,421.75 231.2,421.75 280.75,372.2 U3.7 393.75,371.2 393.75,332.75 317.75,256.75 182.07,256.75 135.75,208.42 159.92,184.25 450.81,184.25 475.31,208.75 475.31,243.25 ; R23.1 475.31,243.25 ; R19.2 705.31,-65.31 721.75,-81.75 721.75,-169.75 743.25,-191.25 906.75,-191.25 928.75,-169.25 928.75,268.25 913.25,283.75 824.25,283.75 770.25,229.75 488.81,229.75 475.31,243.25
NetC11_1: C11.1 R27.1 U3.5 | length 194.1
  Top Layer w6: C11.1 R27.1 295.31,442.68 314.61,423.39 U3.5
NetC16_1: C16.1 R38.1 R39.2 | length 328.5
  Bottom Layer w6: C16.1 -560.47,-443.25 -583.25,-466.03 -583.25,-536.25 -582.25,-537.25 -456.31,-537.25 -455.31,-536.25 R39.2 R38.1
NetC16_2: C16.2 R35.1 R36.2 U5.7 | length 1125.5
  Top Layer w6: v1(-608.03,-353.25) -501.25,-353.25 -477.25,-377.25 v1(-381.25,-377.25)
  Bottom Layer w6: C16.2 -619.53,-364.75 v1(-608.03,-353.25) ; U5.7 v1(-381.25,-377.25) ; v1(-381.25,-377.25) v1(-381.25,-377.25) ; R36.2 -67.01,73.5 -49.25,55.75 -49.25,-198.25 -62.25,-211.25 -306.75,-211.25 -324.68,-229.18 R35.1 -324.68,-307.64 -381.25,-364.2 v1(-381.25,-377.25)
NetC17_1: C17.1 R39.1 U5.5 | length 192.6
  Bottom Layer w6: C17.1 -532.25,-510 -524.38,-517.87 R39.1 -494.68,-469.25 -453.82,-428.39 U5.5
NetC22_1: C22.1 R55.1 R56.2 | length 630.6
  Bottom Layer w6: C22.1 165.47,-419.25 142.75,-419.25 141.75,-420.25 141.75,-619.75 153.5,-631.5 153.5,-653.97 168.25,-668.72 210.54,-668.72 225.54,-653.72 307.72,-653.72 329.69,-631.75 R56.2 R55.1
NetC22_2: C22.2 R48.2 R51.1 U7.7 | length 1104.5
  Bottom Layer w6: C22.2 224.53,-393.47 240.8,-377.2 U7.7 394.73,-377.2 415.18,-356.75 415.18,-306.39 460.32,-261.25 R51.1 460.32,-227.25 459.32,-226.25 349.75,-226.25 348.75,-225.25 348.75,-131.75 361.25,-119.25 642.25,-119.25 690,-71.5 R48.2
NetC23_1: C23.1 R56.1 U7.5 | length 295.6
  Bottom Layer w6: C23.1 165.47,-488.53 180.75,-473.25 243.25,-473.25 268.75,-498.75 268.75,-516.87 R56.1 290.32,-499.25 348.81,-440.75 348.81,-428.39 U7.5
NetP1_1: P1.1 R62.2 R65.2 | length 2405.7
  Top Layer w6: P1.1 -580.75,-954.25 228.81,-954.25 307.75,-875.31 R62.2 ; R65.2 395,-458.5 v2(482.25,-545.75)
  Conexiones w6: P1.1 -296,-930 -96.25,-730.25 297.75,-730.25 v2(482.25,-545.75)
NetR1_1: R1.1 R28.1 R29.2 U4.7 | length 502
  Top Layer w6: U4.7 317.86,-182.8 294.75,-159.68 R28.1 221.43,-159.68 216.75,-155 R29.2 179.69,-111.81 193.25,-98.25 388.75,-98.25 414.69,-72.31 R1.1
NetR1_2: R1.2 R24.2 U4.2 | length 972
  Top Layer w6: R1.2 346.5,-50 318.25,-78.25 180.75,-78.25 166.75,-64.25 166.75,-24.25 176.88,-14.12 461.27,-14.12 474.08,-26.92 474.08,-54.26 460.29,-68.04 460.29,-169.25 473.84,-182.8 U4.2 573.07,-182.8 603.37,-152.5 660.84,-152.5 668.66,-160.32 R24.2
NetR2_1: R2.1 R5.1 R6.2 U1.6 | length 1012
  Top Layer w6: R2.1 -395.31,205.75 -429.31,171.75 -569.25,171.75 -585.25,187.75 -585.25,232.5 -543.22,274.54 -543.22,363.21 -578.25,398.25 -578.25,455.75 -577.25,456.75 -520.75,456.75 -507.25,443.25 -507.25,410.8 -494.25,397.8 U1.6 -383.3,397.8 -364.25,378.75 -364.25,357.1 -341.6,356.1 -280.31,294.81 R6.2 R5.1
NetR3_1: R3.1 R11.1 R12.1 | length 228.7
  Top Layer w6: R12.1 -265.57,-290 -256.92,-281.35 -256.92,-254.08 -227.53,-224.69 R11.1 -153.25,-224.69 -128.25,-199.69 R3.1
NetR3_2: R3.2 R7.1 U2.3 | length 205.2
  Top Layer w6: U2.3 -191.25,-157.2 -188.14,-160.31 R3.2 R7.1
NetR4_1: R4.1 R5.2 R9.2 U1.1 | length 363.6
  Top Layer w6: R9.2 -360.31,397.75 -352.25,389.69 -352.25,369.75 -351.25,368.75 -330.39,368.75 -308.25,346.61 U1.1 -233.05,346.61 -206.75,320.31 R4.1 -195,294.43 -190.31,289.75 R5.2
NetR4_2: R4.2 RX1A.1 RX2A.1 RX3A.1 RX4A.1 RX5A.1 RX6A.1 RX7A.1 RX8A.1 U1.2 | length 2724.9
  Top Layer w6: RX8A.1 -280,712.16 -292.25,712.16 -298.84,718.75 -298.84,856.66 -231.75,923.75 396.75,923.75 414.75,905.75 414.75,700.18 395.32,680.75 365.32,680.75 345.75,700.32 RX1A.1 325,643.25 312.5,630.75 216.5,630.75 204,643.25 RX2A.1 RX3A.1 163.67,633.67 2.33,472.33 ; U1.2 -238.25,372.2 -225.73,359.69 R4.2 -110.31,359.69 2.33,472.33 ; RX6A.1 RX7A.1 -159,618.25 -145.5,604.75 -27.67,604.75 2.33,634.75 ; RX4A.1 42.67,710.35 2.33,710.35 RX5A.1 2.33,634.75 ; 2.33,472.33 2.33,634.75
NetR8_2: R8.2 U2.1 | length 358.7
  Top Layer w6: R8.2 -290.31,-310.25 -291.31,-309.25 -394.25,-309.25 -406.75,-296.75 -406.75,-242.25 -372.89,-208.39 U2.1
NetR11_2: R11.2 R13.2 U2.2 | length 385.4
  Top Layer w6: R13.2 -384.69,-31.25 -383.69,-30.25 -314.25,-30.25 -303.25,-41.25 -303.25,-181.8 -302.25,-182.8 U2.2 -216.25,-182.8 -213.73,-185.31 R11.2
NetR12_2: R12.2 R14.2 U2.6 | length 327.8
  Top Layer w6: R14.2 -495.14,-120.31 -458.25,-157.2 U2.6 v1(-371.25,-157.25) v1(-371.25,-157.25) ; v2(-371.25,-276.25) -330.69,-276.25 -329.69,-277.25 R12.2
  Conexiones w6: v2(-371.25,-276.25) v1(-371.25,-157.25)
NetR13_1: R13.1 R14.1 R15.2 U2.7 | length 380
  Top Layer w6: R15.2 -548.25,-155 -543.57,-159.69 R14.1 -478.36,-159.69 -455.25,-182.8 U2.7 -394.71,-182.8 -391.25,-186.25 -356.75,-186.25 -342.25,-171.75 -342.25,-66.31 -345.31,-63.25 R13.1
NetR16_2: R16.2 U2.5 | length 105.2
  Top Layer w6: R16.2 -455.31,-131.61 U2.5
NetR17_1: R17.1 R24.1 R25.1 | length 789.1
  Top Layer w6: R25.1 476.75,-290 476.75,-301.25 468.75,-309.25 419.75,-309.25 406.25,-295.75 355.75,-295.75 343.25,-308.25 343.25,-343.25 355.75,-355.75 541.75,-355.75 557.75,-339.75 557.75,-218.5 611.75,-164.5 647.75,-164.5 648.84,-165.6 648.84,-217.59 ; R17.1 641.75,-224.68 ; R24.1 666.75,-199.69 648.84,-217.59 ; 641.75,-224.68 647.75,-224.68 648.84,-223.59 648.84,-217.59 ; 641.75,-224.68 648.84,-217.59
NetR17_2: R17.2 R19.1 U4.3 | length 2673.2
  Top Layer w6: U4.3 477.75,-157.2 476.75,-156.2 476.75,-110.25 486.75,-100.25 486.75,-17.25 466.75,2.75 73.25,2.75 29.52,46.47 -166.25,46.47 -167.25,47.47 -167.25,93.25 -154.75,105.75 117.75,105.75 152.75,140.75 544.75,140.75 550.75,134.75 550.75,58.75 527.75,35.75 527.75,-72.68 559.75,-104.68 R19.1 680,-124.98 709,-153.98 709,-394.27 693.25,-410.02 626.52,-410.02 610.75,-394.25 610.75,-186.31 611.75,-185.31 R17.2
NetR18_1: R18.1 R22.1 R23.2 U3.6 | length 577.8
  Top Layer w6: U3.6 400.7,397.8 417.75,380.75 417.75,328.75 436.75,309.75 544.75,309.75 544.75,288.75 ; R18.1 429.5,230 442.75,243.25 442.75,275.75 455.75,288.75 544.75,288.75 ; R23.2 R22.1 565.31,287.75 ; 544.75,288.75 565.31,287.75 ; 544.75,288.75 564.31,288.75 565.31,287.75
NetR20_2: R20.2 U4.1 | length 150.7
  Top Layer w6: R20.2 484.69,-320.25 485.69,-319.25 493.25,-319.25 505.75,-306.75 505.75,-208.39 U4.1
NetR21_1: R21.1 R22.2 R26.2 U3.1 | length 371.5
  Top Layer w6: R26.2 431.75,490 431.75,369.75 454.88,346.61 U3.1 534.45,346.61 560.75,320.32 R21.1 605,292.06 604.68,291.75 R22.2
NetR21_2: R21.2 RX1B.1 RX2B.1 RX3B.1 RX4B.1 RX5B.1 RX6B.1 RX7B.1 RX8B.1 U3.2 | length 3840.9
  Top Layer w6: v2(-200.25,622.75) -239.67,662.16 RX8B.1 ; RX7B.1 RX8B.1 ; RX6B.1 -60.25,700.32 ; v2(-44.25,778.75) 243.25,778.75 261.25,760.75 ; RX5B.1 -60.25,700.32 ; RX4B.1 101.75,700.32 ; RX3B.1 104.75,700.32 ; RX2B.1 261.75,700.32 ; RX1B.1 261.75,700.32 ; U3.2 553.75,372.2 566.27,359.69 R21.2 605,376.75 726.25,377.75 931.75,583.25 931.75,933.25 895.25,969.75 -285.25,969.75 -310.84,944.16 -310.84,693.25 -296.34,678.75 -240.67,678.75 RX8B.1 ; -60.25,700.32 -59.25,701.32 -59.25,759.75 -58.25,760.75 101.75,760.75 102.75,759.75 102.75,701.32 101.75,700.32 ; 101.75,700.32 104.75,700.32 ; 104.75,700.32 103.75,701.32 103.75,759.75 104.75,760.75 261.25,760.75 ; 261.25,760.75 262.18,760.75 263.18,759.75 263.18,701.74 261.75,700.32
  Conexiones w6: v2(-200.25,622.75) v2(-44.25,778.75)
NetR25_2: R25.2 R28.2 U4.6 | length 312
  Top Layer w6: R28.2 274.86,-120.31 311.75,-157.2 U4.6 408.75,-157.2 445.31,-193.77 R25.2
NetR30_2: R30.2 U4.5 | length 321
  Top Layer w6: R30.2 309.69,-32.11 310.75,-31.05 446.69,-31.05 459.89,-44.25 459.89,-51.47 379.75,-131.61 U4.5
NetR31_1: R31.1 R34.1 R35.2 U5.6 | length 1175.3
  Top Layer w6: v1(-646.25,-269.25) -598.25,-317.25 -492.75,-317.25 -461.75,-348.25 -352.25,-348.25 -346.25,-354.25 -244.25,-354.25 -222.25,-332.25 v1(-222.25,-278.25)
  Conexiones w6: v1(-646.25,-269.25) -512.25,-403.25 v1(-504.25,-403.25)
  Bottom Layer w6: v1(-646.25,-269.25) -641.25,-264.25 -641.25,-222.25 -606.25,-187.25 -419.68,-187.25 R31.1 ; v1(-504.25,-403.25) -503.8,-402.8 U5.6 ; R35.2 R34.1 -224.68,-275.82 v1(-222.25,-278.25)
NetR32_1: R32.1 R40.1 R41.1 | length 636.5
  Bottom Layer w6: R41.1 -295.31,309.75 -296.31,310.75 -355.25,310.75 -356.25,311.75 -356.25,362.75 -355.25,363.75 -90.25,363.75 -72.25,345.75 -72.25,255.75 -103.31,224.69 -123.25,224.69 ; R40.1 -123.25,224.69 ; R32.1 -103.25,204.69 -123.25,224.69
NetR32_2: R32.2 R36.1 U6.3 | length 365.7
  Bottom Layer w6: U6.3 -231.25,142.2 -216.15,157.31 -211.25,157.31 ; R36.1 -132.64,112.87 -133.77,111.75 -211.25,111.75 -212.25,112.75 -212.25,156.31 -211.25,157.31 ; R32.2 -90,157.31 -211.25,157.31
NetR33_1: R33.1 R34.2 R38.2 U5.1 | length 893.7
  Bottom Layer w6: R38.2 -106.75,-517.87 -59.5,-470.62 -59.5,-333.75 -44.25,-318.5 -44.25,-257.5 -56.75,-245 -164.09,-245 ; U5.1 -219.25,-351.61 -204.25,-336.61 -204.25,-306.31 -203.25,-305.31 R33.1 -163.9,-305.31 -162.84,-304.25 -162.84,-246.25 -164.09,-245 ; R34.2 -164.09,-245
NetR33_2: R33.2 RY1A.1 RY2A.1 RY3A.1 RY4A.1 RY5A.1 RY6A.1 RY7A.1 RY8A.1 U5.2 | length 2114.8
  Top Layer w6: v1(-227.25,-655.25) v1(-99.25,-783.25)
  Conexiones w6: v1(-260,-633) -183.25,-556.25 -146.25,-556.25 -137.25,-565.25 2.75,-565.25 5.75,-304.75 -6.75,-292.25 v1(-73.3,-292.25)
  Bottom Layer w6: U5.2 -205.45,-377.2 ; v1(-260,-633) -260,-688 ; v1(-227.25,-655.25) -260,-688 ; R33.2 -185,-356.75 -205.45,-377.2 ; RY2A.1 -117.25,-705.31 ; v1(-99.25,-783.25) -118.25,-764.25 -118.25,-706.31 -117.25,-705.31 ; RY3A.1 -117.25,-705.31 ; v1(-73.3,-292.25) -158.25,-377.2 -205.45,-377.2 ; RY4A.1 RY5A.1 62.67,-684.25 ; RY7A.1 197.69,-705.31 ; RY8A.1 345,-686.5 330.75,-672.25 230.75,-672.25 197.69,-705.31 ; -260,-688 RY1A.1 -247.25,-705.31 -246.25,-704.31 -246.25,-694.25 -221.25,-669.25 50.17,-669.25 62.67,-681.75 62.67,-684.25 ; 62.67,-684.25 166,-684.25 RY6A.1 197.69,-705.31
NetR37_2: R37.2 U6.1 | length 515.7
  Bottom Layer w6: R37.2 -333.69,349.75 -103.25,349.75 -88.25,332.75 -227.61,193.39 U6.1
NetR40_2: R40.2 R42.2 U6.2 | length 385.3
  Bottom Layer w6: R42.2 -399.69,74.86 -306.75,167.8 U6.2 -223.72,167.8 -206.2,185.31 R40.2
NetR41_2: R41.2 R43.2 U6.6 | length 297.6
  Bottom Layer w6: R43.2 -499.14,115.31 -472.25,142.2 U6.6 -397.25,142.2 -334.69,204.77 R41.2
NetR42_1: R42.1 R43.1 R44.2 U6.7 | length 672.1
  Bottom Layer w6: U6.7 -470.14,167.8 -483.25,154.69 R43.1 -537.94,154.69 -538.25,155 R44.2 -560.31,136.75 -585,112.06 -585,-75.01 -569.25,-90.75 -393.25,-90.75 -360.31,-57.81 R42.1
NetR45_2: R45.2 U6.5 | length 124.3
  Bottom Layer w6: R45.2 -455.31,48.75 -436.69,67.37 U6.5
NetR46_1: R46.1 R52.1 R53.1 | length 237.7
  Bottom Layer w6: R53.1 553.43,295 628.75,219.69 R52.1 661.75,219.69 676.75,204.69 R46.1
NetR46_2: R46.2 R48.1 U8.3 | length 249.5
  Bottom Layer w6: U8.3 545.2,142.2 564.75,161.75 623.69,161.75 665.75,119.69 R48.1 R46.2
NetR47_1: R47.1 R50.1 R51.2 U7.6 | length 488.6
  Bottom Layer w6: U7.6 414.7,-402.8 462.75,-354.75 462.75,-289.19 499.69,-252.25 R51.2 ; R47.1 370.32,-213.25 371.32,-214.25 482.19,-214.25 499.69,-231.75 R51.2 ; R50.1 R51.2
NetR49_1: R49.1 R50.2 R55.2 U7.1 | length 918.8
  Bottom Layer w6: R55.2 632.13,-517.87 800.75,-349.25 800.75,-265 780.75,-245 R50.2 599.69,-275.94 600,-276.25 R49.1 538.63,-305.31 511.69,-332.25 U7.1
NetR49_2: R49.2 RY1B.1 RY2B.1 RY3B.1 RY4B.1 RY5B.1 RY6B.1 RY7B.1 RY8B.1 U7.2 | length 1932.6
  Top Layer w6: v1(-8.25,-798.25) v1(113.75,-798.25)
  Conexiones w6: v1(122.75,-798.25) 247.75,-798.25 v1(258.75,-787.25) 448.28,-597.72 539.65,-597.72 748.75,-388.63 v1(748.75,-330.25)
  Bottom Layer w6: RY1B.1 RY2B.1 -179.33,-682.25 -178.33,-681.25 -59.33,-681.25 -58.33,-682.25 RY3B.1 -36.25,-705.31 ; RY4B.1 -36.25,-705.31 ; v1(-8.25,-798.25) -37.25,-769.25 -37.25,-706.31 -36.25,-705.31 ; RY5B.1 121.75,-705.31 ; v1(113.75,-798.25) v1@122.75,-789.25 ; v1(122.75,-798.25) v1@122.75,-789.25 ; RY6B.1 122.75,-705.31 ; v1(258.75,-787.25) 285.75,-760.25 285.75,-705.31 ; RY7B.1 285.75,-705.31 ; RY8B.1 285.75,-705.31 ; U7.2 548.23,-377.2 ; R49.2 580.75,-344.69 548.23,-377.2 ; v1(748.75,-330.25) 627.75,-330.25 606.66,-351.34 580.8,-377.2 548.23,-377.2 ; 121.75,-705.31 122.75,-705.31 ; 121.75,-705.31 122.75,-706.31 ; v1@122.75,-789.25 122.75,-706.31 ; 122.75,-706.31 122.75,-705.31
NetR52_2: R52.2 R54.2 U8.2 | length 459.8
  Bottom Layer w6: R54.2 375.31,2.75 376.31,1.75 455.75,1.75 469.75,15.75 469.75,166.8 470.75,167.8 U8.2 550.75,167.8 563.27,180.31 R52.2
NetR53_2: R53.2 R57.2 U8.6 | length 534.5
  Conexiones w6: v1(176.75,110.75) 349.75,283.75 v1(388.75,283.75)
  Bottom Layer w6: v1(176.75,110.75) 181.31,115.31 R57.2 292.75,115.31 319.64,142.2 U8.6 ; v1(388.75,283.75) 400,295 R53.2
NetR54_1: R54.1 R57.1 R60.2 U8.7 | length 322.6
  Bottom Layer w6: R60.2 246.75,155 247.06,154.69 R57.1 301.75,154.69 314.86,167.8 U8.7 387.8,167.8 414.69,140.91 R54.1
NetR58_2: R58.2 U8.5 | length 120.2
  Bottom Layer w6: R58.2 319.69,116.61 U8.5
NetR59_2: R59.2 U8.1 | length 350.7
  Bottom Layer w6: R59.2 374,345 359.75,330.75 359.75,244.75 411.11,193.39 U8.1
NetR61_1: R61.1 U9.1 U10.3 | length 951.4
  Top Layer w6: U10.3 173.52,-412.6 188.87,-397.25 387.28,-397.25 529.75,-539.72 529.75,-681.75 517.25,-694.25 466.75,-694.25 447.75,-675.25 380.75,-675.25 366.61,-689.39 U9.1 366.61,-790.95 345.32,-812.25 R61.1
NetR61_2: R61.2 R62.1 U9.2 | length 391.2
  Top Layer w6: R61.2 384.69,-814.25 ; R62.1 385,-931.75 403.5,-950.25 461.25,-950.25 479.75,-931.75 479.75,-890.25 461.75,-872.25 461.75,-831.75 443.25,-813.25 385.69,-813.25 384.69,-814.25 ; U9.2 392.2,-797.73 384.69,-805.25 384.69,-814.25
NetR63_W: R63.W U10.4 | length 1424.3
  Top Layer w6: U10.4 35.75,-412.6 75.09,-373.25 484.75,-373.25 535.75,-424.25 939.75,-424.25 972.75,-457.25 972.75,-834 966.75,-840 R63.W
NetR64_1: R64.1 U9.7 U11.3 | length 440.7
  Top Layer w6: U11.3 148.75,-652.6 149.75,-651.6 149.75,-556.75 171.5,-535 R64.1 390.32,-566.48 U9.7
NetR64_2: R64.2 R65.1 U9.6 | length 127.9
  Top Layer w6: R65.1 395,-497.57 429.69,-532.25 R64.2 429.69,-563.36 417.8,-575.25 U9.6
NetR66_W: R66.W U11.4 | length 1532.7
  Top Layer w6: U11.4 18.75,-652.6 -8.91,-680.25 -121.25,-680.25 -122.25,-679.25 -122.25,-452.25 -121.25,-451.25 63.75,-451.25 88.75,-426.25 88.75,-391.25 94.75,-385.25 392.25,-385.25 447.25,-440.25 639.75,-440.25 704.5,-505 R66.W
NetRX1A_2: RX1A.2 RX1B.2 SIGX.1 | length 252
  Top Layer w6: v2(267.5,845) 325,787.5 RX1A.2 RX1B.2
  Conexiones w6: SIGX.1 v2(267.5,845)
NetRX2A_2: RX2A.2 RX2B.2 SIGX.3 | length 394.4
  Top Layer w6: RX2B.2 RX2A.2 204,727.75 205,726.75 223.75,726.75 224.75,725.75 224.75,679.75 241.75,662.75 v2(258.75,662.75)
  Conexiones w6: SIGX.3 135,786.5 v2(258.75,662.75)
NetRX3A_2: RX3A.2 RX3B.2 SIGX.5 | length 343.7
  Top Layer w6: v1(95.75,660.75) 122.75,660.75 142.75,680.75 142.75,738.69 141.75,739.69 ; RX3B.2 141.75,739.69 ; RX3A.2 141.75,739.69
  Bottom Layer w6: SIGX.5 85,671.5 v1(95.75,660.75)
NetRX4A_2: RX4A.2 RX4B.2 SIGX.7 | length 431.8
  Top Layer w6: RX4A.2 64.75,739.69 ; v2(63.75,602.75) 63.75,738.69 64.75,739.69 ; RX4B.2 64.75,739.69
  Conexiones w6: SIGX.7 35,631.5 v2(63.75,602.75)
NetRX5A_2: RX5A.2 RX5B.2 SIGX.9 | length 401.1
  Top Layer w6: v2(-84.25,649.75) -52.25,649.75 -17.25,684.75 -17.25,738.69 -16.25,739.69 ; RX5B.2 -16.25,739.69 ; RX5A.2 -16.25,739.69
  Conexiones w6: v2(-84.25,649.75) -15,719 SIGX.9
NetRX6A_2: RX6A.2 RX6B.2 SIGX.11 | length 151.2
  Top Layer w6: RX6A.2 RX6B.2 -78.33,802.16 -65,815.49 SIGX.11
NetRX7A_2: RX7A.2 RX7B.2 SIGX.13 | length 163.9
  Top Layer w6: RX7B.2 RX7A.2 -159,801 SIGX.13
NetRX8A_2: RX8A.2 RX8B.2 SIGX.15 | length 176.6
  Top Layer w6: RX8A.2 RX8B.2 -239.67,770.33 SIGX.15
NetRY1A_2: RY1A.2 RY1B.2 SIGY.1 | length 205.7
  Bottom Layer w6: RY1A.2 RY1B.2 -219.67,-790.33 SIGY.1
NetRY2A_2: RY2A.2 RY2B.2 SIGY.3 | length 211.6
  Bottom Layer w6: RY2B.2 RY2A.2 -139,-808.94 -123.19,-824.75 -91.5,-824.75 -85,-831.25 SIGY.3
NetRY3A_2: RY3A.2 RY3B.2 SIGY.5 | length 180.3
  Bottom Layer w6: RY3A.2 RY3B.2 -58.33,-851.67 SIGY.5
NetRY4A_2: RY4A.2 RY4B.2 SIGY.7 | length 173.7
  Bottom Layer w6: RY4B.2 RY4A.2 22.33,-810.71 15,-818.04 SIGY.7
NetRY5A_2: RY5A.2 RY5B.2 SIGY.9 | length 171.6
  Bottom Layer w6: SIGY.9 65,-811.25 62.67,-808.92 RY5A.2 RY5B.2
NetRY6A_2: RY6A.2 RY6B.2 SIGY.11 | length 199.1
  Bottom Layer w6: SIGY.11 183.67,-806.33 RY6A.2 RY6B.2
NetRY7A_2: RY7A.2 RY7B.2 SIGY.13 | length 195.1
  Bottom Layer w6: SIGY.13 224,-816 RY7A.2 RY7B.2
NetRY8A_2: RY8A.2 RY8B.2 SIGY.15 | length 207.8
  Bottom Layer w6: SIGY.15 304.66,-785.34 RY8B.2 RY8A.2
NetSIGX_Out_1: SIGX_Out.1 U10.1 | length 1735.3
  Top Layer w6: U10.1 v2(227.75,-487.4)
  Conexiones w6: SIGX_Out.1 -845,-362.5 -454.25,-753.25 -145.25,-753.25 -80.25,-688.25 90.25,-688.25 168.25,-610.25 211.75,-610.25 227.75,-594.25 v2(227.75,-487.4)
NetSIGY_Out_15: SIGY_Out.15 U11.1 | length 1743.7
  Top Layer w6: v2(-166.25,-585.25) -166.25,-694.25 -110.25,-750.25 90.9,-750.25 113.75,-727.4 U11.1
  Conexiones w6: v2(-166.25,-585.25) -165,-584 141.25,-580.75 141.25,-417.57 175.75,-383.07 213.93,-383.07 502,-95 SIGY_Out.15
XA_N: R29.1 SIGX_Out.15 | length 1177.6
  Top Layer w6: SIGX_Out.15 -702.75,67.75 -212.25,67.75 -178.98,34.47 21.02,34.47 140.32,-84.82 R29.1
XA_P: R20.1 SIGX_Out.13 | length 2092.2
  Top Layer w6: v2(383.75,-326.75) 392,-335 R20.1
  Conexiones w6: SIGX_Out.13 -478.75,-206.25 -413.25,-206.25 -410.25,-209.25 -410.25,-531.25 -235.65,-705.85 -150.85,-705.85 -41,-596 151.75,-596 153.25,-594.5 153.25,-557.25 188.75,-521.75 188.75,-398.25 189.75,-397.25 313.25,-397.25 v2(383.75,-326.75)
XB_N: R15.1 SIGX_Out.7 | length 293.7
  Top Layer w6: v1(-681.25,-134.25) -660.5,-155 R15.1
  Conexiones w6: SIGX_Out.7 -700.75,-134.25 v1(-681.25,-134.25)
XB_P: R8.1 SIGX_Out.5 | length 637.5
  Top Layer w6: v2(-453.25,-293.25) -411.5,-335 R8.1
  Conexiones w6: SIGX_Out.5 -731.5,-153.5 -713.5,-153.5 -597.63,-269.37 -477.13,-269.37 v2(-453.25,-293.25)
YA_N: R60.1 SIGY_Out.11 | length 855.5
  Top Layer w6: v1(123.75,161.75) 125.25,160.25 694.75,160.25 SIGY_Out.11
  Bottom Layer w6: v1(123.75,161.75) 130.5,155 R60.1
YA_P: R59.1 SIGY_Out.9 | length 562.3
  Conexiones w6: v1(703.75,332.5) 703.75,201.25 SIGY_Out.9
  Bottom Layer w6: R59.1 691.25,345 v1(703.75,332.5)
YB_N: R44.1 SIGY_Out.3 | length 1676.3
  Top Layer w6: v1(-661.25,190.75) -600.25,129.75 24.75,129.75 94.75,199.75 127.25,199.75 154.75,172.25 817.25,172.25 SIGY_Out.3
  Bottom Layer w6: v1(-661.25,190.75) -619.25,190.75 -599.68,171.18 R44.1
YB_P: R37.1 SIGY_Out.1 | length 1662.7
  Conexiones w6: v1(-255.25,310.75) 112.75,310.75 239.75,437.75 581.75,437.75 599.75,455.75 599.75,599.25 618.25,617.75 739.75,617.75 850,507.5 SIGY_Out.1
  Bottom Layer w6: R37.1 -274.5,330 v1(-255.25,310.75)
pads on no net: SIGX_Out.3 SIGX_Out.9 SIGX_Out.11 SIGY_Out.5 SIGY_Out.7 SIGY_Out.13

## Polygon pours and split planes (outlines as drawn)
GND on Tierra (split plane): 999.9,-999.9 -999.9,-999.9 -999.9,999.9 999.9,999.9

## Text inside footprints (layer, text, board x,y; h text height)
P1: Bottom Overlay "1" at -542.01,-950 h39.37; Bottom Overlay "9" at -860.91,-950 h39.37
P2: Top Overlay "9" at 860.91,855 h39.37; Top Overlay "1" at 542.01,855 h39.37
SIGX: Bottom Overlay "15" at -215,825 h39.37; Bottom Overlay "1" at 247.99,825 h39.37
SIGX_Out: Top Overlay "15" at -825,260 h39.37 r90; Top Overlay "1" at -825,-202.99 h39.37 r90
SIGY: Bottom Overlay "15" at 265,-855 h39.37 r180; Bottom Overlay "1" at -197.99,-855 h39.37 r180
SIGY_Out: Top Overlay "15" at 830,-145 h39.37 r270; Top Overlay "1" at 830,317.99 h39.37 r270